# Altium PCB PCB.PcbDoc
Units mil, origin at the board's own origin, x right, y up, seen from the top; angles counter-clockwise.
Board outline 2000 x 2375 mil, 2 copper layers (Top Layer, Bottom Layer); 116 components, 71 nets, 524 pads, 4 vias.
Unrouted connection lines stored in the file: 213.
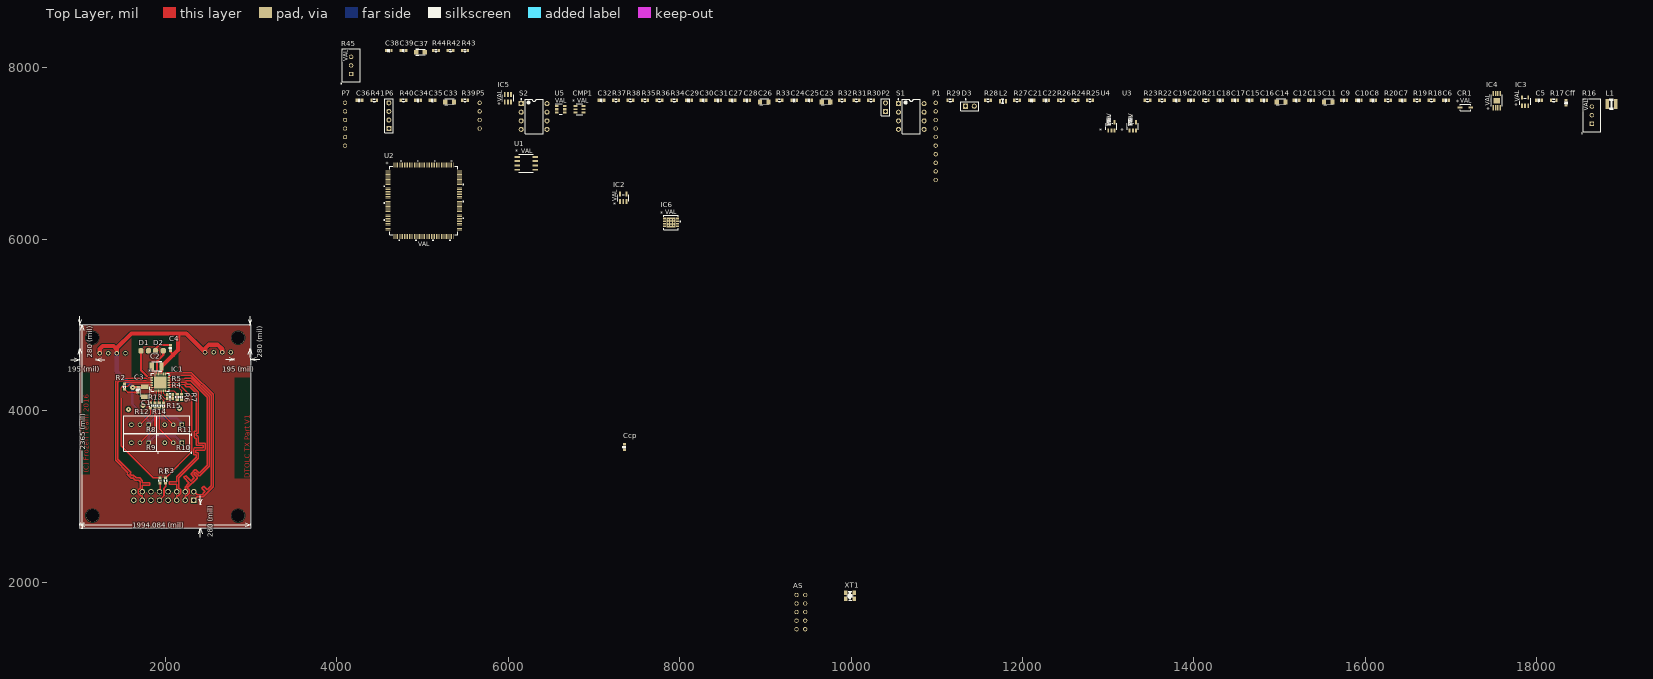
[diagram p0: Top Layer view]
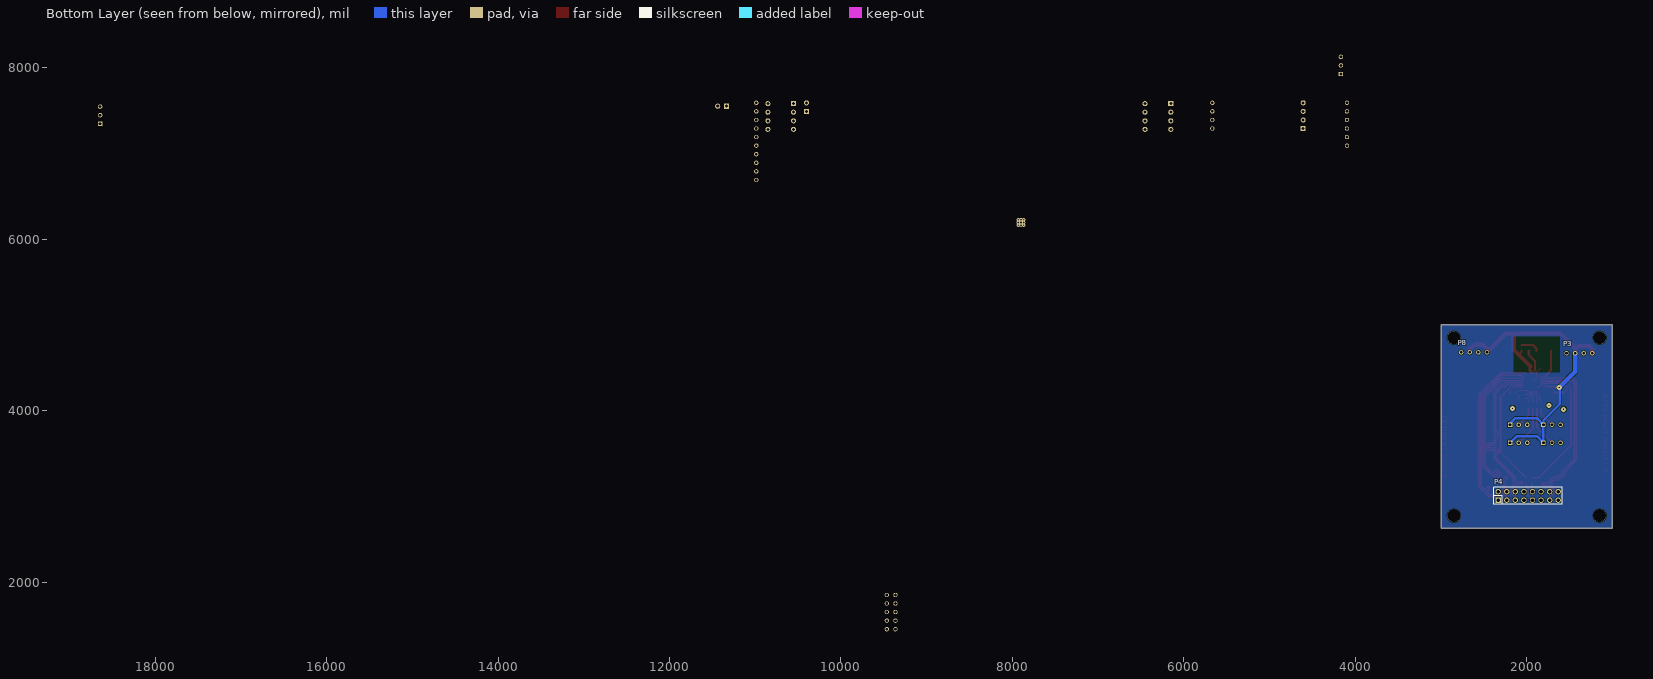
[diagram p1: Bottom Layer view, seen from below]

## Layer stack, top to bottom
Top Solder: solder mask 0.4, Solder Resist, Dk 3.5
Top Layer: signal copper 1.4
Dielectric 1: dielectric 12.6, FR-4, Dk 4.8
Bottom Layer: signal copper 1.4
Bottom Solder: solder mask 0.4, Solder Resist, Dk 3.5

## Board outline
1000,5000 3000,5000 3000,2625 1000,2625

## Design rules (kind name [scope] priority, off if disabled: settings)
Clearance [All] p1: gap=7
DiffPairsRouting DiffPair_DIFF100DiffPairsRouting [InDifferentialPair ('DIFF100')] p1: maxlimit=12 minlimit=10 mostfreqgap=10 toplayer_minwidth=10 toplayer_maxwidth=35 toplayer_prefwidth=31 bottomlayer_minwidth=10 bottomlayer_maxwidth=35 bottomlayer_prefwidth=31 maxuncoupledlength=500
DiffPairsRouting [All] p2: maxlimit=10 minlimit=10 mostfreqgap=10 toplayer_minwidth=15 toplayer_maxwidth=15 toplayer_prefwidth=15 bottomlayer_minwidth=15 bottomlayer_maxwidth=15 bottomlayer_prefwidth=15 maxuncoupledlength=500
MatchedLengths [InNetClass('DIFF100')] p1: tolerance=10 checknetsindiffpair=FALSE checkdiffpairvsdiffpair=TRUE checkxsignals=TRUE checkothers=TRUE
MatchedLengths DiffPair_DIFF100MatchedLengths [InDifferentialPair ('TX_EN2')] p2: tolerance=10 checknetsindiffpair=FALSE checkdiffpairvsdiffpair=TRUE checkxsignals=TRUE checkothers=TRUE
PlaneClearance [All] p1: clearance=25
PolygonConnect [All] p1: connectstyle=Relief reliefconductorwidth=10 reliefentries=4 polygonreliefangle="90 Angle" airgapwidth=10
RoomDefinition TransmitterV1 [InComponentClass('TransmitterV1')] p1: confinementstyle=ConfineIn formatcopy=TRUE lockcomponents=FALSE outline 1000,2625 3000,2625 3000,5000 1000,5000
RoomDefinition PhotodiodeReceiverV1 [InComponentClass('PhotodiodeReceiverV1')] p2: confinementstyle=ConfineIn formatcopy=TRUE lockcomponents=FALSE outline 4037.6,5636 18957.6,5636 18957.6,8331 4037.6,8331
RoomDefinition PowerSupply [InComponentClass('PowerSupply')] p3: confinementstyle=ConfineIn formatcopy=TRUE lockcomponents=FALSE outline 7045,2645 14165,2645 14165,3755 7045,3755
RoomDefinition Main [InComponentClass('Main')] p4: confinementstyle=ConfineIn formatcopy=TRUE lockcomponents=FALSE outline 7045,1060 20945,1060 20945,3175 7045,3175
RoutingVias [All] p1: holewidth=28 width=50 viastyle="Through Hole" minholewidth=28 minwidth=50 maxholewidth=28 maxwidth=50
SolderMaskExpansion [All] p1: expansion=4
Width [All] p1: maxlimit=150 minlimit=8 preferedwidth=10 minimp=50.000000 maximp=50.000000 favimp=50.000000
28 further rules are at their usual default settings.

## Classes and differential pairs
component class Main: AS IC2 U1 U2 XT1
component class PhotodiodeReceiverV1: C5 C6 C7 C8 C9 C10 C11 C12 C13 C14 C15 C16 C17 C18 C19 C20 C21 C22 C23 C24 C25 C26 C27 C28 C29 C30 C31 C32 C33 C34 C35 C36 Cff CMP1 CR1 D3 IC3 IC4 IC5 L1 L2 P1 P2 P5 P6 P7 R16 R17 R18 R19 R20 R21 R22 R23 R24 R25 R26 R27 R28 R29 R30 R31 R32 R33 R34 R35 R36 R37 R38 R39 R40 R41 S1 S2 U3 U4 U5
component class PowerSupply: C37 C38 C39 Ccp IC6 R42 R43 R44 R45
component class TransmitterV1: C1 C2 C3 C4 D1 D2 IC1 P3 P4 P8 R1 R2 R3 R4 R5 R6 R7 R8 R9 R10 R11 R12 R13 R14 R15
net class DIFF100: TX_EN2_N TX_EN2_P TX_EN3_N TX_EN3_P TX_EN4_N TX_EN4_P TX_OSC_EN_N TX_OSC_EN_P
differential pair class DIFF100: TX_EN2 TX_EN3 TX_EN4 TX_OSC_EN
differential pair TX_EN4: +TX_EN4_P -TX_EN4_N
differential pair TX_EN2: +TX_EN2_P -TX_EN2_N
differential pair TX_EN3: +TX_EN3_P -TX_EN3_N
differential pair TX_OSC_EN: +TX_OSC_EN_P -TX_OSC_EN_N

## Components (designator, comment, footprint, x,y, rotation, side; value= is the part's Value field where it differs from the comment)
AS "HDR2x5_2.54" HDR2X5_2.54_180 9365,1850 r0 top
C1 "Cap_Tan_1210" CAP_TAN_B1210 1761,4220 r270 top
C2 "Cap_Tan_1210" CAP_TAN_B1210 1900,4515 r180 top
C3 "Cap_0603" CAP_0603 1680,4243 r90 top
C4 "Cap_0603" CAP_0603 2060,4730 r270 top
C5 "Cap_0603" CAP_0603 18027.6,7621 r0 top
C6 "Cap_0603" CAP_0603 16942.6,7621 r0 top
C7 "Cap_0603" CAP_0603 16432.6,7621 r0 top
C8 "Cap_0603" CAP_0603 16092.6,7621 r0 top
C9 "Cap_0603" CAP_0603 15752.6,7621 r0 top
C10 "Cap_0603" CAP_0603 15922.6,7621 r0 top
C11 "Cap_Tan_1206" CAP_TAN_A1206 15567.6,7601 r0 top
C12 "Cap_0603" CAP_0603 15197.6,7621 r0 top
C13 "Cap_0603" CAP_0603 15367.6,7621 r0 top
C14 "Cap_Tan_1206" CAP_TAN_A1206 15017.6,7601 r0 top
C15 "Cap_0603" CAP_0603 14647.6,7621 r0 top
C16 "Cap_0603" CAP_0603 14817.6,7621 r0 top
C17 "Cap_0603" CAP_0603 14477.6,7621 r0 top
C18 "Cap_0603" CAP_0603 14307.6,7621 r0 top
C19 "Cap_0603" CAP_0603 13797.6,7621 r0 top
C20 "Cap_0603" CAP_0603 13967.6,7621 r0 top
C21 "Cap_0603" CAP_0603 12107.6,7621 r0 top
C22 "Cap_0603" CAP_0603 12277.6,7621 r0 top
C23 "Cap_Tan_1206" CAP_TAN_A1206 9707.6,7601 r0 top
C24 "Cap_0603" CAP_0603 9337.6,7621 r0 top
C25 "Cap_0603" CAP_0603 9507.6,7621 r0 top
C26 "Cap_Tan_1206" CAP_TAN_A1206 8987.6,7601 r0 top
C27 "Cap_0603" CAP_0603 8617.6,7621 r0 top
C28 "Cap_0603" CAP_0603 8787.6,7621 r0 top
C29 "Cap_0603" CAP_0603 8107.6,7621 r0 top
C30 "Cap_0603" CAP_0603 8277.6,7621 r0 top
C31 "Cap_0603" CAP_0603 8447.6,7621 r0 top
C32 "Cap_0603" CAP_0603 7087.6,7621 r0 top
C33 "Cap_Tan_1206" CAP_TAN_A1206 5317.6,7601 r0 top
C34 "Cap_0603" CAP_0603 4947.6,7621 r0 top
C35 "Cap_0603" CAP_0603 5117.6,7621 r0 top
C36 "Cap_0603" CAP_0603 4267.6,7621 r0 top
C37 "Cap_Tan_1206" CAP_TAN_A1206 4977.6,8181 r0 top
C38 "Cap_0603" CAP_0603 4607.6,8201 r0 top
C39 "Cap_0603" CAP_0603 4777.6,8201 r0 top
Ccp "Cap_0603" CAP_0603 7355,3575 r90 top
Cff "Cap_0603" CAP_0603 18342.6,7591 r90 top
CMP1 "LMH7220MKNOPB" MK06A 6832.6,7516 r0 top
CR1 "MBR0530PBF" DIODE_SOD123 17167.6,7536 r0 top
D1 "Laser Diode" LaserDiode 1716,4698 r0 top
D2 "Laser Diode" LaserDiode 1976,4698 r180 top
D3 "BXT65" PIN2 11337.6,7551 r0 top
IC1 "LMH6525SPNOPB" SPA28A 1941,4330 r0 top
IC2 "TPS76912DBVR" DBV5 7342.6,6481 r90 top
IC3 "LM27313XMFXNOPB" MF05A 17862.6,7606 r90 top
IC4 "TPS7A4901DGNT" DGN8_1P89X1P57 17532.6,7616 r90 top
IC5 "DAC7571IDBVT" DBV6 5997.6,7646 r90 top
IC6 "LP38798SD-ADJNOP" DNT12 7900,6195 r0 top
L1 "Ind_CD32" IND_CD32 18872.6,7576 r0 top
L2 "Ind_0805" IND_0805 11772.6,7611 r0 top
P1 "HDR1x10_2.54" HDR1X10_2.54_180 10987.6,7591 r0 top
P2 "Header 2" HDR1X2 10402.6,7491 r90 top
P3 "HDR1x4_2.54" HDR1x4_2.54_180 1235,4670 r270 bottom
P4 "WE-2.54 mm Pin Header" 61301621121 1983,3005 r180 bottom
P5 "HDR1x4_2.54" HDR1x4_2.54_180 5667.6,7591 r0 top
P6 "Header 4" HDR1X4 4607.6,7291 r90 top
P7 "HDR1x6_2.54" HDR1X6_2.54_180 4097.6,7591 r0 top
P8 "HDR1x4_2.54" HDR1x4_2.54_180 2465,4680 r270 bottom
R1 "Res_0603" RES_0603 1940,3185 r90 top
R2 "Res_0603" RES_0603 1525,4283 r90 top
R3 "Res_0603" RES_0603 2005,3185 r270 top
R4 "Res_0603" RES_0603 2055,4140 r180 top
R5 "Res_0603" RES_0603 2055,4185 r180 top
R6 "Res_0603" RES_0603 2140,4161 r90 top
R7 "Res_0603" RES_0603 2190,4161 r90 top
R8 "3296W-1-512LF" POT_3296W 1606,3840 r180 top
R9 "3296W-1-512LF" POT_3296W 1606,3630 r180 top
R10 "3296W-1-512LF" POT_3296W 1995,3630 r180 top
R11 "3296W-1-512LF" POT_3296W 1995,3840 r180 top
R12 "Res_0603" RES_0603 1830,4058 r90 top
R13 "Res_0603" RES_0603 1880,4058 r90 top
R14 "Res_0603" RES_0603 1930,4058 r90 top
R15 "Res_0603" RES_0603 1980,4058 r90 top
R16 "3296W-1-134LF" POT_3296W 18647.6,7546 r90 top
R17 "Res_0603" RES_0603 18197.6,7621 r0 top
R18 "Res_0603" RES_0603 16772.6,7621 r0 top
R19 "Res_0603" RES_0603 16602.6,7621 r0 top
R20 "Res_0603" RES_0603 16262.6,7621 r0 top
R21 "Res_0603" RES_0603 14137.6,7621 r0 top
R22 "Res_0603" RES_0603 13627.6,7621 r0 top
R23 "Res_0603" RES_0603 13457.6,7621 r0 top
R24 "Res_0603" RES_0603 12617.6,7621 r0 top
R25 "Res_0603" RES_0603 12787.6,7621 r0 top
R26 "Res_0603" RES_0603 12447.6,7621 r0 top
R27 "Res_0603" RES_0603 11937.6,7621 r0 top
R28 "Res_0603" RES_0603 11597.6,7621 r0 top
R29 "Res_0603" RES_0603 11157.6,7621 r0 top
R30 "Res_0603" RES_0603 10232.6,7621 r0 top
R31 "Res_0603" RES_0603 10062.6,7621 r0 top
R32 "Res_0603" RES_0603 9892.6,7621 r0 top
R33 "Res_0603" RES_0603 9167.6,7621 r0 top
R34 "Res_0603" RES_0603 7937.6,7621 r0 top
R35 "Res_0603" RES_0603 7597.6,7621 r0 top
R36 "Res_0603" RES_0603 7767.6,7621 r0 top
R37 "Res_0603" RES_0603 7257.6,7621 r0 top
R38 "Res_0603" RES_0603 7427.6,7621 r0 top
R39 "Res_0603" RES_0603 5497.6,7621 r0 top
R40 "Res_0603" RES_0603 4777.6,7621 r0 top
R41 "Res_0603" RES_0603 4437.6,7621 r0 top
R42 "Res_0603" RES_0603 5327.6,8201 r0 top
R43 "Res_0603" RES_0603 5497.6,8201 r0 top
R44 "Res_0603" RES_0603 5157.6,8201 r0 top
R45 "3296W-1-502LF" POT_3296W 4172.6,8126 r90 top
S1 "SW-DIP4" DIP-8 10702.6,7431 r0 top
S2 "SW-DIP4" DIP-8 6302.6,7431 r0 top
U1 "EPCS4SI8N" 8-SOIC 6210,6885 r0 top
U2 "EP2C5T144C8N" 144-TQFP 5015,6450 r0 top
U3 "LMH6629MFENOPB" MF05A 13287.6,7316 r90 top
U4 "LMH6629MFENOPB" MF05A 13037.6,7316 r90 top
U5 "OPA625IDBVR" DBV0006A_N 6612.6,7516 r0 top
XT1 "XTAL_3225_4P" XT_3225_4 9990,1840 r0 top

## Footprints (in the part's own frame and the unit in brackets; to place one, negate y for a bottom-side part, rotate by r counter-clockwise, add the part's x,y. Pads: shape width x height; smd on the part's side, far side on the other; paste and mask are expansions set on the pad)
8-SOIC [mil]
  rect 63x22 smd: 1(-104.5,75) 2(-104.5,25) 3(-104.5,-25) 4(-104.5,-75) 5(104.5,-75) 6(104.5,-25) 7(104.5,25) 8(104.5,75)
  silkscreen extent -84,-103 84,103
144-TQFP [mil]
  rect 58x11 smd: 1(-418,344.49) 2(-418,324.8) 3(-418,305.12) 4(-418,285.43) 5(-418,265.75) 6(-418,246.06) 7(-418,226.38) 8(-418,206.69) 9(-418,187.01) 10(-418,167.32) 11(-418,147.64) 12(-418,127.95) 13(-418,108.27) 14(-418,88.58) 15(-418,68.9) 16(-418,49.21) 17(-418,29.53) 18(-418,9.84) 19(-418,-9.84) 20(-418,-29.53) 21(-418,-49.21) 22(-418,-68.9) 23(-418,-88.58) 24(-418,-108.27) 25(-418,-127.95) 26(-418,-147.64) 27(-418,-167.32) 28(-418,-187.01) 29(-418,-206.69) 30(-418,-226.38) 31(-418,-246.06) 32(-418,-265.75) 33(-418,-285.43) 34(-418,-305.12) 35(-418,-324.8) 36(-418,-344.49) 73(418,-344.49) 74(418,-324.8) 75(418,-305.12) 76(418,-285.43) 77(418,-265.75) 78(418,-246.06) 79(418,-226.38) 80(418,-206.69) 81(418,-187.01) 82(418,-167.32) 83(418,-147.64) 84(418,-127.95) 85(418,-108.27) 86(418,-88.58) 87(418,-68.9) 88(418,-49.21) 89(418,-29.53) 90(418,-9.84) 91(418,9.84) 92(418,29.53) 93(418,49.21) 94(418,68.9) 95(418,88.58) 96(418,108.27) 97(418,127.95) 98(418,147.64) 99(418,167.32) 100(418,187.01) 101(418,206.69) 102(418,226.38) 103(418,246.06) 104(418,265.75) 105(418,285.43) 106(418,305.12) 107(418,324.8) 108(418,344.49)
  rect 11x58 smd: 37(-344.49,-418) 38(-324.8,-418) 39(-305.12,-418) 40(-285.43,-418) 41(-265.75,-418) 42(-246.06,-418) 43(-226.38,-418) 44(-206.69,-418) 45(-187.01,-418) 46(-167.32,-418) 47(-147.64,-418) 48(-127.95,-418) 49(-108.27,-418) 50(-88.58,-418) 51(-68.9,-418) 52(-49.21,-418) 53(-29.53,-418) 54(-9.84,-418) 55(9.84,-418) 56(29.53,-418) 57(49.21,-418) 58(68.9,-418) 59(88.58,-418) 60(108.27,-418) 61(127.95,-418) 62(147.64,-418) 63(167.32,-418) 64(187.01,-418) 65(206.69,-418) 66(226.38,-418) 67(246.06,-418) 68(265.75,-418) 69(285.43,-418) 70(305.12,-418) 71(324.8,-418) 72(344.49,-418) 109(344.49,418) 110(324.8,418) 111(305.12,418) 112(285.43,418) 113(265.75,418) 114(246.06,418) 115(226.38,418) 116(206.69,418) 117(187.01,418) 118(167.32,418) 119(147.64,418) 120(127.95,418) 121(108.27,418) 122(88.58,418) 123(68.9,418) 124(49.21,418) 125(29.53,418) 126(9.84,418) 127(-9.84,418) 128(-29.53,418) 129(-49.21,418) 130(-68.9,418) 131(-88.58,418) 132(-108.27,418) 133(-127.95,418) 134(-147.64,418) 135(-167.32,418) 136(-187.01,418) 137(-206.69,418) 138(-226.38,418) 139(-246.06,418) 140(-265.75,418) 141(-285.43,418) 142(-305.12,418) 143(-324.8,418) 144(-344.49,418)
  silkscreen extent -467,-467 467,467
61301621121 [mm] "16 pins, dual pin, straight, gold plating"
  rect 1.6x1.6 hole 1.1: 1(-8.89,-1.27)
  round 1.6 hole 1.1: 2(-6.35,-1.27) 3(-3.81,-1.27) 4(-1.27,-1.27) 5(1.27,-1.27) 6(3.81,-1.27) 7(6.35,-1.27) 8(8.89,-1.27) 9(8.89,1.27) 10(6.35,1.27) 11(3.81,1.27) 12(1.27,1.27) 13(-1.27,1.27) 14(-3.81,1.27) 15(-6.35,1.27) 16(-8.89,1.27)
  silkscreen extent -10.16,-2.54 10.16,2.54, body extent -10.16,-2.54 10.16,2.54, height 8.55
CAP_0603 [mil]
  rect 28x36 smd: 1(-32,0) 2(32,0)
  silkscreen extent -10,-16 10,16, body extent -31,-16 32,16, height 36
CAP_TAN_A1206 [mil]
  rect 50x54 smd: 1(-50,0) 2(50,0)
  silkscreen extent -55,-39 55,39, body extent -63,-31 63,32, height 71
CAP_TAN_B1210 [mil]
  rect 50x92 smd: 1(-57,0) 2(57,0)
  silkscreen extent -60,-60 60,60, body extent -69,-55 69,55, height 83
DBV5 [mil]
  rect 58x22 smd: 1(-44,37.4) 2(-44,0) 3(-44,-37.4) 4(44,-37.4) 5(44,37.4)
  silkscreen extent -40,-65 40,65
DBV6 [mil]
  rect 58x22 smd: 1(-44,37.4) 2(-44,0) 3(-44,-37.4) 4(44,-37.4) 5(44,0) 6(44,37.4)
  silkscreen extent -40,-65 40,65
DBV0006A_N [mm]
  rect 1.1x0.65 smd paste+0 mask+0.051: 1(-1.2,0.95) 2(-1.2,0) 3(-1.2,-0.95) 4(1.2,-0.95) 5(1.2,0) 6(1.2,0.95)
  silkscreen extent -1.68,-1.55 0.5,1.55, body extent -1.42,-1.46 1.42,1.46, height 1.09
DGN8_1P89X1P57 [mil]
  rect 62x17 smd: 1(-82.5,38.39) 2(-82.5,12.8) 3(-82.5,-12.8) 4(-82.5,-38.39) 5(82.5,-38.39) 6(82.5,-12.8) 7(82.5,12.8) 8(82.5,38.39)
  rect 61.81x74.41 smd paste-36.7: EPAD(0,0)
  silkscreen extent -66,-66 66,66
DIODE_SOD123 [mil]
  rect 53x28 smd: 1(-63.5,0) 2(63.5,0)
  silkscreen extent -61,-38 61,38
DIP-8 [mm] "DIP; 8 Leads; Row Spacing 7.62 mm; Pitch 2.54 mm"
  rect 1.5x1.5 hole 0.9: 1(-3.81,3.81)
  round 1.5 hole 0.9: 2(-3.81,1.27) 3(-3.81,-1.27) 4(-3.81,-3.81) 5(3.81,-3.81) 6(3.81,-1.27) 7(3.81,1.27) 8(3.81,3.81)
  silkscreen extent -3.93,-5.15 2.65,5.23, body extent -3.6,-5.15 3.6,5.15, height 5.08
DNT12 [mil]
  rect 31.68x11.81 smd: 1(-76.87,49.21) 2(-76.87,29.53) 3(-76.87,9.84) 4(-76.87,-9.84) 5(-76.87,-29.53) 6(-76.87,-49.21) 7(76.87,-49.21) 8(76.87,-29.53) 9(76.87,-9.84) 10(76.87,9.84) 11(76.87,29.53) 12(76.87,49.21)
  rect 102.36x118.11 smd paste-58.56 mask-58.5: 13(0,0)
  round 40 / inner round 60 / far side round 40 hole 20: V(-31,-31) V(-31,0) V(-31,31) V(0,-31) V(0,0) V(0,31) V(31,-31) V(31,0) V(31,31)
  silkscreen extent -86,-84 113,84
HDR1X2 [mm] "Connector; Header; 2 Position"
  rect 1.5x1.5 hole 0.9: 1(0,0)
  round 1.5 hole 0.9: 2(2.54,0)
  silkscreen extent -1.27,-1.27 3.81,1.27
HDR1X4 [mm] "Connector; Header; 4 Position"
  rect 1.5x1.5 hole 0.9: 1(0,0)
  round 1.5 hole 0.9: 2(2.54,0) 3(5.08,0) 4(7.62,0)
  silkscreen extent -1.27,-1.27 8.89,1.27
HDR1x4_2.54_180 [mil]
  round 50 hole 32: 1(0,0) 2(0,-100) 3(0,-200) 4(0,-300)
  body extent -49,-350 49,50, height 323
HDR1X6_2.54_180 [mil]
  round 50 hole 32: 1(0,0) 2(0,-100) 3(0,-200) 4(0,-300) 5(0,-400) 6(0,-500)
  body extent -49,-550 49,50, height 323
HDR1X10_2.54_180 [mil]
  round 50 hole 32: 1(0,0) 2(0,-100) 3(0,-200) 4(0,-300) 5(0,-400) 6(0,-500) 7(0,-600) 8(0,-700) 9(0,-800) 10(0,-900)
  body extent -49,-950 49,50, height 323
HDR2X5_2.54_180 [mil]
  round 50 hole 32: 1(0,0) 2(100,0) 3(0,-100) 4(100,-100) 5(0,-200) 6(100,-200) 7(0,-300) 8(100,-300) 9(0,-400) 10(100,-400)
IND_0805 [mil]
  rect 26x52 smd: 1(-36,0) 2(36,0)
  silkscreen extent -12,-24 12,24, body extent -39,-24 39,24, height 41
IND_CD32 [mil]
  rect 40x120 smd: 1(-50,0) 2(50,0)
  silkscreen extent -20,-60 20,60, body extent -68,-59 68,59, height 83
LaserDiode [mil]
  rrect50% 60x60 smd: A(0,0) K(90,0)
MF05A [mil]
  rect 50x22 smd: 1(-48,37.5) 2(-48,0) 3(-48,-37.5) 4(48,-37.5) 5(48,37.5)
  silkscreen extent -38,-64 38,64
MK06A [mil]
  rect 48x21 smd: 1(-46,37.4) 2(-46,0) 3(-46,-37.4) 4(46,-37.4) 5(46,0) 6(46,37.4)
  silkscreen extent -40,-66 40,66
PIN2 [mm] "Photosensitive Diode; 2 Leads"
  rect 1.5x1.5 hole 0.9: 1(0,0)
  round 1.5 hole 0.9: 2(2.54,0)
  silkscreen extent -1.4,-1.4 3.94,2.17
POT_3296W [mil]
  round 52 / inner round 60 / far side round 52 hole 32: 1(1,5) 2(-99,5)
  rect 52x52 / inner round 60 / far side rect 52x52 hole 32: 3(-199,5)
  silkscreen extent -315,-100 93,125, body extent -286,-92 89,103, height 455
RES_0603 [mil]
  rect 28x36 smd: 1(-32,0) 2(32,0)
  silkscreen extent -10,-16 10,16, body extent -31,-16 32,16, height 20
SPA28A [mil]
  rect 30x12 smd: 1(-97.5,59.06) 2(-97.5,39.37) 3(-97.5,19.69) 4(-97.5,0) 5(-97.5,-19.69) 6(-97.5,-39.37) 7(-97.5,-59.06) 15(97.5,-59.06) 16(97.5,-39.37) 17(97.5,-19.69) 18(97.5,0) 19(97.5,19.69) 20(97.5,39.37) 21(97.5,59.06)
  rect 12x30 smd: 8(-59.06,-97.5) 9(-39.37,-97.5) 10(-19.68,-97.5) 11(0,-97.5) 12(19.68,-97.5) 13(39.37,-97.5) 14(59.06,-97.5) 22(59.06,97.5) 23(39.37,97.5) 24(19.68,97.5) 25(0,97.5) 26(-19.68,97.5) 27(-39.37,97.5) 28(-59.06,97.5)
  rect 141.73x141.73 smd paste-70.37: 29(0,0)
  silkscreen extent -106,-106 106,106, body extent -102,-102 103,103, height 20
XT_3225_4 [mil]
  rect 40x48 smd: 1(-50,-35) 2(50,-35) 3(50,35) 4(-50,35)
  silkscreen extent -38,-54 38,54, body extent -63,-49 63,49, height 41

## Part data
AS P1 P5: "Header"
C1 C2 C3 C4 C5 C6 C7 C8 C9 C10 C11 C12 C13 C14 C15 C16 C17 C18 C19 C20 C21 C22 C23 C24 C25 C26 C27 C28 C29 C30 C31 C32 C33 C34 C35 C36 C37 C38 C39 Ccp Cff: "Capacitor"
CMP1 CR1 IC1 IC2 IC3 IC4 IC5 IC6 U2 U3 U4 U5: "Imported"
D3: library part "Photo Sen", "Photosensitive Diode"
L1 L2: "Inductor"
P2: "Header, 2-Pin"
P3 P8: library part HDR1x4_2.54T, "Header"
P4: library part "WE-2.54 mm Pin Header & Jumper 61301621121", "WR-PHD 2.54 mm Dual Pin Header"
P6: "Header, 4-Pin"
P7: library part HDR1x6_2.54T, "Header"
R1 R2 R3 R4 R5 R6 R7 R12 R13 R14 R15 R17 R18 R19 R20 R21 R22 R23 R24 R25 R26 R27 R28 R29 R30 R31 R32 R33 R34 R35 R36 R37 R38 R39 R40 R41 R42 R43 R44: "Resistor"
R8 R9 R10 R11 R16 R45: library part 3296W-1-503LF, "Imported"
S1 S2: "DIP Switch"
U1: library part epcs4si8n, "Imported"
XT1: "Crystal Oscillator"

## Free pads (board coordinates)
  round 150 / inner round 60 / far side round 150 hole 150: 3(1150,2775) 3(1150,4850) 3(2850,2775) 3(2850,4850)

## Via types
v1: diameter 60, hole 15, Top Layer to Bottom Layer, 4 vias

## Nets (pads, with @x,y where several pads share a name; then routed paths per layer and width w, separated by ;. In a path a pad name is that pad's centre, name@x,y a point inside that pad or via, vN(x,y) a via of type N, cw(c..) or ccw(c..) an arc to the next point about the centre after c; other vN are vias at no path point)
+3.3V: C11.1 C12.2 C13.2 C14.1 C15.2 C16.2 C23.1 C24.2 C25.2 C26.1 C27.2 C28.2 C33.1 C34.2 C35.2 C37.1 C38.2 C39.2 CMP1.5 IC6.10 IC6.11 IC6.12 R23.2 R31.1 R35.2 R36.2 S1.1 U1.3 U1.7 U1.8 U3.5 U4.5 U5.6
+3.3V_REF: IC5.3
+5V: C1.1 C2.1 C3.2 C4.2 C7.2 IC1.6 IC1.24 IC1.25 IC1.26 IC3.4 IC3.5 IC6.1 IC6.2 IC6.3 L1.1 P3.1 P3.3 P8.1 P8.3 R8.3 R9.3 R10.3 R11.3 S1.2 | length 4958.4
  Top Layer w10: C1.1 1774.63,4290.63 IC1.6 ; IC1.26 1921.32,4448.31 C2.1@1957,4484 ; IC1.25 1941,4448 1957,4464 C2.1@1957,4484 ; C2.1 C2.1@1957,4484 ; IC1.24 1960.68,4447.69 1971,4458 C2.1@1971,4501
  Top Layer w12: C2.1 C2.1@1971,4501
  Top Layer w20: v1@1627,4275 C3.2 ; C3.2@1680,4277 C1.1
  Top Layer w25: C4.2 2060,4688 2095,4653
  Top Layer w50: P3.1 1235,4720 1270,4755 1395,4755 1435,4715 ; P3.3 1435,4715 ; C2.1 2095,4653 2150,4708 2150,4900 ; P8.3 2665,4715 2610,4770 2510,4770 2465,4725 P8.1 2245,4900 2150,4900 ; 1435,4715 1435,4730 1605,4900 2150,4900
  Bottom Layer w25: v1@1615,4263 1615,4078 1805,3888 R8.3
  Bottom Layer w30: R10.3 2116,3703 1883,3703 R9.3 R8.3 1883,3913 2130,3913 R11.3@2194,3849
  Bottom Layer w50: P3.3 1435,4455 v1(1620,4270)
+20V: C5.2 C8.2 C10.2 CR1.1 IC4.5 IC4.8 R17.1
+DREG: C6.2 Cff.2 IC4.1 R16.3 S1.3
GND: C1.2 C2.2 C3.1 C4.1 C6.1 C7.1 C8.1 C9.1 C10.1 C11.2 C12.1 C13.1 C14.2 C15.1 C16.1 C21.1 C23.2 C24.1 C25.1 C26.2 C27.1 C28.1 C29.2 C30.2 C31.2 C33.2 C34.1 C35.1 C36.2 C37.2 C38.1 C39.1 Ccp.1 CMP1.2 D1.K D2.K IC1.7 IC1.28 IC1.29 IC3.2 IC4.3 IC4.4 IC4.EPAD IC5.2 IC6.6 IC6.7 IC6.13 L2.1 P2.1 P3.2 P3.4 P4.4 P4.6 P4.8 P4.9 P4.11 P4.13 P5.3 P5.4 P6.1 P6.2 P7.2 P7.4 P7.6 P8.2 P8.4 R2.1 R4.1 R5.1 R6.1 R7.1 R8.1 R9.1 R10.1 R11.1 R19.1 R20.2 R26.1 R27.2 R28.2 R41.1 R45.1 U1.4 U2.6 U2.19 U2.33 U2.39 U2.49 U2.56 U2.61 U2.68 U2.78 U2.98 U2.105 U2.111 U2.117 U2.123 U2.128 U2.130 U2.140 U3.2 U4.2 U5.2 U5.5 | length 678.7
  Top Layer w8: IC1.29@1881.94,4389.06 IC1.29
  Top Layer w10: C2.2@1843,4491 1881.94,4452.06 IC1.28 ; IC1.7 IC1.29@1881.94,4270.94
  Top Layer w12: IC1.29@1881.94,4389.06 IC1.28 ; R4.1 R5.1
  Top Layer w20: R2.1 1565,4211 C3.1
  Top Layer w25: D2.K@1890,4702 D2.K 1886,4721 1930,4765 2057,4765 C4.1
  other v1: 1570,4015 2165,4025 1740,4060
MEM_ASDI: U1.5
MEM_CLK: U1.6
MEM_CS_N: U1.1
MEM_DATA: U1.2
NetC5_1: C5.1 IC3.3 R17.2 R19.2
NetC9_2: C9.2 IC4.6
NetC17_1: C17.1 C20.1 R21.1 R24.1 U3.1
NetC17_2: C17.2 C19.2 D3.1 R21.2 R29.1 U3.4
NetC18_1: C18.1 CMP1.1 R22.1 R27.1 R30.2 R32.2 R33.2 U4.1
NetC18_2: C18.2 C22.1 R22.2 R25.1 U4.4
NetC19_1: C19.1 C20.2
NetC21_2: C21.2 R23.1 R26.2 U3.3 U4.3
NetC22_2: C22.2 L2.2 R24.2 R25.2 R28.1
NetC29_1: C29.1 C30.1 C31.1 R30.1 R31.2 R32.1 R33.1 S2.1
NetC32_1: C32.1 CMP1.4 R34.1 R37.2
NetC32_2: C32.2 CMP1.6 R37.1 R40.2
NetC36_1: C36.1 R40.1 R41.2 U5.1 U5.4
NetCcp_2: Ccp.2 IC6.4
NetCff_1: Cff.1 IC4.2 R18.2 R20.1
NetCMP1_3: CMP1.3 R39.2
NetCR1_2: CR1.2 IC3.1 L1.2
NetD1_A: D1.A IC1.1 | length 387.3
  Top Layer w10: 1786,4403 1799.94,4389.06 IC1.1
  Top Layer w25: D1.A 1716,4473 1786,4403
NetD2_A: D2.A IC1.27 | length 301.3
  Top Layer w10: IC1.27 1901.63,4472.37
  Top Layer w25: 1901.63,4472.37 1901.63,4573.63 1976,4648 D2.A
NetD3_2: D3.2 R29.2 S1.5 S1.6 S1.7 S1.8
NetIC1_4: IC1.4 R2.2 | length 326.1
  Top Layer w10: R2.2 1541,4331 1843.5,4331 IC1.4
NetIC1_5: IC1.5 R1.2 | length 1666.6
  Top Layer w10: 1485,4145 1485,4268 1500,4283 1560,4283 1591,4314 1811.97,4314 1815.66,4310.31 IC1.5
  Top Layer w20: 1485,4145 1485,3590 1858,3217 R1.2
NetIC1_8: IC1.8 R12.2 | length 164
  Top Layer w10: R12.2 1830,4108 1850,4128 1850,4165 1881.94,4196.94 IC1.8
NetIC1_9: IC1.9 R13.2 | length 151.5
  Top Layer w10: R13.2 1880,4155 1901.63,4176.63 IC1.9
NetIC1_10: IC1.10 R14.2 | length 133.8
  Top Layer w10: R14.2@1921.32,4098.69 IC1.10
NetIC1_11: IC1.11 R15.2 | length 158.7
  Top Layer w10: IC1.11 1941,4154 1980,4115 R15.2
NetIC1_12: IC1.12 R4.2 | length 134.7
  Top Layer w10: IC1.12 1960.68,4174.31 1995,4140 R4.2
NetIC1_13: IC1.13 R5.2 | length 84.1
  Top Layer w10: IC1.13 1980.37,4195.37 1990.74,4185 R5.2
NetIC1_14: IC1.14 R6.2 | length 156.3
  Top Layer w10: IC1.14 2100.5,4232.5 R6.2
NetIC1_15: IC1.15 R7.2 | length 207.2
  Top Layer w10: IC1.15 2152.06,4270.94 2190,4233 R7.2
NetIC1_16: IC1.16 R3.1 | length 1390.8
  Top Layer w10: IC1.16 2179.37,4290.63 2190,4280
  Top Layer w20: R3.1 2305,3517 2305,4165 2190,4280
NetIC5_1: IC5.1 S2.2
NetIC5_4: IC5.4 P7.5 R36.1
NetIC5_5: IC5.5 P7.3 R35.1
NetIC5_6: IC5.6 P7.1
NetIC6_5: IC6.5 R42.1
NetIC6_8: IC6.8 R43.2 R44.2
NetIC6_9: IC6.9 R43.1
NetP2_2: P2.2 S1.4
NetP5_1: P5.1 R34.2 R38.1
NetP5_2: P5.2 R38.2 R39.1
NetP6_3: P6.3 S2.4
NetP6_4: P6.4 S2.3
NetR8_2: R8.2 R12.1 | length 242.8
  Top Layer w20: R8.2 1830,3960 R12.1
NetR9_2: R9.2 R13.1 | length 473.5
  Top Layer w20: R9.2 1880,3800 R13.1
NetR10_2: R10.2 R14.1 | length 468.9
  Top Layer w20: R14.1 1930,3789 R10.2
NetR11_2: R11.2 R15.1 | length 238.2
  Top Layer w20: R15.1 1980,3949 R11.2
NetR16_1: R16.1 R16.2 R18.1
NetR44_1: R44.1 R45.2 R45.3
NetS2_5: S2.5 S2.6 S2.7 S2.8 U5.3
PS_3.3V_EN: R42.2
TX_EN2_N: IC1.17 P4.14 | length 2028.9
  Top Layer w10: IC1.17 2214.68,4310.31
  Top Layer w15: P4.14 2133,3125 2133,3140 2043.84,3140 2043.84,3170 2133,3170 2133,3200 2133,3225 2133,3228 2360,3455 2360,3484.82 2336.82,3484.82 2329.5,3492.14 2329.5,3557.5 2336.82,3564.82 2443,3564.82 2443,3594.82 2367.32,3594.82 2360,3602.14 2360,3680 2345.65,3680 2338.33,3687.32 2338.33,3752.68 2345.65,3760 2360,3760 2360,4205 2285,4280 2245,4280 2220,4305
TX_EN2_P: IC1.18 P4.3 | length 2036.2
  Top Layer w10: IC1.18 2230.36,4330
  Top Layer w15: P4.3 2133,3009 2152.05,3009 2179,3035.95 2179,3074.05 2158,3095.05 2158,3217.64 2377.68,3437.32 2385,3444.64 2385,3502.5 2377.68,3509.82 2354.5,3509.82 2354.5,3539.82 2460.68,3539.82 2468,3547.14 2468,3612.5 2460.68,3619.82 2385,3619.82 2385,3697.68 2377.68,3705 2363.33,3705 2363.33,3735 2377.68,3735 2385,3742.32 2385,4215.36 2377.68,4222.68 2302.68,4297.68 2295.36,4305 2255.36,4305 2230.36,4330
TX_EN3_N: IC1.19 P4.15 | length 2041.2
  Top Layer w10: IC1.19 2241.15,4349.69
  Top Layer w15: P4.15 2233,3108 2270,3145 2280.61,3155.61 2215.91,3220.3 2237.12,3241.52 2301.82,3176.82 2323.03,3198.03 2340.61,3215.61 2300.41,3255.8 2300.41,3266.16 2346.62,3312.37 2356.98,3312.37 2397.18,3272.18 2490,3365 2490,4155 2295,4350 2241.47,4350
TX_EN3_P: IC1.20 P4.2 | length 2039.5
  Top Layer w10: IC1.20 2219.01,4369.37 2224.64,4375
  Top Layer w15: 2224.64,4375 2305.36,4375 2312.68,4367.68 2432.68,4247.68 2507.68,4172.68 2513,4167.36 2513,3352.64 2402.35,3242 2392,3242 2351.8,3282.19 2330.59,3260.98 2370.78,3220.78 2370.78,3210.43 2258,3097.64 2258,3095.05 2279,3074.05 2279,3035.95 2252.05,3009 2233,3009 P4.2
TX_EN4_N: IC1.21 P4.16 | length 2037.7
  Top Layer w15: IC1.21@2038.5,4389.87 2063.63,4415 2300,4415 2535,4180 2535,3185 2535,3167.5 2535,3137.5 2535,3122.5 2531.75,3119.25 2510.53,3098.03 2489.32,3076.82 2448.67,3117.47 2427.46,3096.26 2468.11,3055.61 2457.5,3045 2430,3017.5 2370.5,3017.5 P4.16
TX_EN4_P: IC1.22 P4.1 | length 2038
  Top Layer w15: IC1.22@2000.87,4427.5 2012.5,4427.5 2025,4440 2310.36,4440 2317.68,4432.68 2552.68,4197.68 2560,4190.36 2560,3112.14 2440.36,2992.5 2370.5,2992.5 P4.1
TX_ENABLE: P4.12 R1.1 | length 100.9
  Top Layer w20: P4.12 1940,3062 R1.1
TX_OSC_EN_N: IC1.3 P4.10 | length 2027.9
  Top Layer w10: 1785,4350 IC1.3
  Top Layer w15: P4.10 1733,3060 1733,3070 1733,3100 1733,3130 1821.37,3130 1821.37,3160 1733,3160 1733,3175 1733,3182 1700,3215 1660,3215 1626.41,3248.59 1616.06,3248.59 1607.09,3239.62 1585.88,3260.84 1594.84,3269.8 1594.84,3280.16 1445,3430 1445,4330 1465.5,4350.5 1780,4350.5
TX_OSC_EN_P: IC1.2 P4.7 | length 2039
  Top Layer w10: 1779.5,4375.5 1785.63,4369.37 IC1.2
  Top Layer w15: P4.7 1733,3009 1713.95,3009 1687,3035.95 1687,3074.05 1708,3095.05 1708,3171.64 1689.64,3190 1649.64,3190 1621.23,3218.41 1612.27,3209.45 1601.91,3209.45 1555.7,3255.66 1555.7,3266.01 1564.67,3274.98 1420,3419.64 1420,4340.36 1455.14,4375.5 1779.5,4375.5
TX_SELB: P4.5 R3.2 | length 227.8
  Top Layer w20: P4.5 1984.5,3006.5 1984.5,3095.58 2005,3116.08 R3.2
pads on no net: AS.1 AS.2 AS.3 AS.4 AS.5 AS.6 AS.7 AS.8 AS.9 AS.10 IC1.23 IC2.1 IC2.2 IC2.3 IC2.4 IC2.5 IC4.7 IC6.V P1.1 P1.2 P1.3 P1.4 P1.5 P1.6 P1.7 P1.8 P1.9 P1.10 U2.1 U2.2 U2.3 U2.4 U2.5 U2.7 U2.8 U2.9 U2.10 U2.11 U2.12 U2.13 U2.14 U2.15 U2.16 U2.17 U2.18 U2.20 U2.21 U2.22 U2.23 U2.24 U2.25 U2.26 U2.27 U2.28 U2.29 U2.30 U2.31 U2.32 U2.34 U2.35 U2.36 U2.37 U2.38 U2.40 U2.41 U2.42 U2.43 U2.44 U2.45 U2.46 U2.47 U2.48 U2.50 U2.51 U2.52 U2.53 U2.54 U2.55 U2.57 U2.58 U2.59 U2.60 U2.62 U2.63 U2.64 U2.65 U2.66 U2.67 U2.69 U2.70 U2.71 U2.72 U2.73 U2.74 U2.75 U2.76 U2.77 U2.79 U2.80 U2.81 U2.82 U2.83 U2.84 U2.85 U2.86 U2.87 U2.88 U2.89 U2.90 U2.91 U2.92 U2.93 U2.94 U2.95 U2.96 U2.97 U2.99 U2.100 U2.101 U2.102 U2.103 U2.104 U2.106 U2.107 U2.108 U2.109 U2.110 U2.112 U2.113 U2.114 U2.115 U2.116 U2.118 U2.119 U2.120 U2.121 U2.122 U2.124 U2.125 U2.126 U2.127 U2.129 U2.131 U2.132 U2.133 U2.134 U2.135 U2.136 U2.137 U2.138 U2.139 U2.141 U2.142 U2.143 U2.144 XT1.1 XT1.2 XT1.3 XT1.4

## Polygon pours and split planes (outlines as drawn)
GND on Top Layer "TopGND" (solid, pour order 0): 1806,4398 1846,4398 1876,4398 1881,4398 1881,4488 1881,4583 1945.5,4647.5 1945.5,4738.5 1931,4753 1881,4753 1751,4753 1731,4733 1731,4618 1731,4543 1731,4473 1786,4418
GND on Top Layer "TopGND" (solid, remove dead copper, pour order 2): 1865,4273 1795,4273 1715,4273 1715,4223 1705,4223 1680,4223 1485,4223 1485,3940 1485,3590 1858,3217 2005,3217 2230,3442 2305,3517 2305,3843 2305,4168 2090,4168 1980,4168 1980,4015 1825,4015 1825,4128 1865,4168
GND on Top Layer "TopGND" (solid, pour order 12): 1000,5000 1610,5000 1610,4450 1610,4445 1610,4440 1610,4385 1455,4385 1455,3385 1495,3350 1690,3155 1690,3055 2055,3055 2290,3050 2505,3050 2570,3115 2565,4200 2310,4455 2225,4455 2150,4455 2150,4925 1610,4925 1610,5000 2150,5000 3000,5000 3000,2625 1000,2625
GND on Bottom Layer "BottomGND" (solid, pour order 10): 1000,5000 1615,5000 2150,5000 2150,4860 1615,4860 1615,4725 1615,4450 2150,4450 2150,4725 2150,5000 3000,5000 3000,2625 1000,2625

## Other copper
Top Layer:
  text "(C) Frozen Team 2016" at 1105,3275 h60 r90
  text "DTOLC TX Part V1" at 2985,3210 h60 r90

## Silkscreen, mask and mechanical layers (free items; w line width, h text height)
Top Overlay:
  lines w5: 985,4660 1005,4720 ; 985,5060 1005,5000 ; 995,4720 1015,4720 ; 995,5000 1015,5000 ; 1000.91,2660.99 1000.92,2680.99 ; 1005,4620 1005,4720 ; 1005,5100 1005,5000 ; 1010,2690 1030,2630 ; 1010,4935 1030,4995 ; 1020,2630 1040,2630 ; 1020,4995 1040,4995 ; 1025,4660 1005,4720 ; 1025,5060 1005,5000 ; 1030,3531.59 1030,2630 ; 1030,4093.41 1030,4995 ; 1050,2690 1030,2630 ; 1050,4935 1030,4995 ; 1060.91,2650.96 1000.92,2670.99 ; 1060.93,2690.96 1000.92,2670.99 ; 1607.08,2670.69 1000.92,2670.99 ; 2388.84,2670.3 2995,2670 ; 2705,4600 2805,4600 ; 2745,4580 2805,4600 ; 2745,4620 2805,4600 ; 2805,4590 2805,4610 ; 2934.99,2650.03 2995,2670 ; 2935.01,2690.03 2995,2670 ; 2970,4660 2990,4720 ; 2970,5060 2990,5000 ; 2980,4720 3000,4720 ; 2980,5000 3000,5000 ; 2990,4620 2990,4720 ; 2990,5100 2990,5000 ; 2994.99,2660 2995,2680 ; 3000,4590 3000,4610 ; 3010,4660 2990,4720 ; 3010,5060 2990,5000 ; 3060,4580 3000,4600 ; 3060,4620 3000,4600 ; 3100,4600 3000,4600
  lines w10: 900,4595 1000,4595 ; 940,4575 1000,4595 ; 940,4615 1000,4595 ; 1000,4585 1000,4605 ; 1195,4585 1195,4605 ; 1255,4575 1195,4595 ; 1255,4615 1195,4595 ; 1295,4595 1195,4595 ; 2390,2565 2410,2625 ; 2390,2965 2410,2905 ; 2400,2625 2420,2625 ; 2400,2905 2420,2905 ; 2410,2525 2410,2625 ; 2410,3005 2410,2905 ; 2430,2565 2410,2625 ; 2430,2965 2410,2905
  text "280 (mil)" at 1148.96,4619.08 h60 r90
  text "280 (mil)" at 3133.96,4619.08 h60 r90
  text "195 (mil)" at 2666.57,4456.04 h60
  text "195 (mil)" at 861.57,4451.04 h60
  text "2365 (mil)" at 1065.99,3541.59 h60 r90
  text "1994.084 (mil)" at 1617.06,2634.69 h60 r359.97
  text "280 (mil)" at 2553.96,2524.08 h60 r90

## Text inside footprints (layer, text, board x,y; h text height)
CMP1: Top Overlay "*" at 6747.6,7581 h50; Top Overlay "VAL" at 6807.6,7591 h50; Mechanical 1 "*" at 6747.6,7581 h50
CR1: Top Overlay "VAL" at 17107.6,7591 h50; Top Overlay "*" at 17062.6,7576 h50; Mechanical 13 "*" at 17062.6,7576 h50; Multi-Layer "Copyright (C) 2015 Accelerated Designs. All rights reserved" at 17167.6,7536 h1
IC1: Top Overlay "*" at 1801,4430 h50; Mechanical 1 "*" at 1801,4430 h50
IC2: Top Overlay "VAL" at 7267.6,6441 h50 r90; Top Overlay "*" at 7277.6,6396 h50 r90; Mechanical 13 "*" at 7277.6,6396 h50 r90; Multi-Layer "Copyright (C) 2015 Accelerated Designs. All rights reserved" at 7342.6,6481 h1 r90
IC3: Top Overlay "*" at 17797.6,7551 h50 r90; Top Overlay "VAL" at 17792.6,7606 h50 r90; Mechanical 1 "*" at 17797.6,7551 h50 r90
IC4: Top Overlay "VAL" at 17452.6,7556 h50 r90; Top Overlay "*" at 17467.6,7506 h50 r90; Mechanical 13 "*" at 17467.6,7506 h50 r90; Multi-Layer "Copyright (C) 2015 Accelerated Designs. All rights reserved" at 17532.6,7616 h1 r90
IC5: Top Overlay "VAL" at 5922.6,7606 h50 r90; Top Overlay "*" at 5932.6,7561 h50 r90; Mechanical 13 "*" at 5932.6,7561 h50 r90; Multi-Layer "Copyright (C) 2015 Accelerated Designs. All rights reserved" at 5997.6,7646 h1 r90
IC6: Top Overlay "*" at 7775,6275 h50; Top Overlay "VAL" at 7835,6290 h50; Mechanical 1 "*" at 7775,6275 h50
R16: Top Overlay "VAL" at 18602.6,7496 h50 r90
R45: Top Overlay "VAL" at 4127.6,8076 h50 r90
U1: Top Overlay "VAL" at 6155,7000 h50; Top Overlay "*" at 6080,6995 h50; Mechanical 13 "*" at 6080,6995 h50; Multi-Layer "Copyright (C) 2015 Accelerated Designs. All rights reserved" at 6210,6885 h1
U2: Top Overlay "*" at 4570,6850 h50; Top Overlay "VAL" at 4950,5920 h50; Mechanical 13 "*" at 4570,6850 h50; Multi-Layer "Copyright (C) 2015 Accelerated Designs. All rights reserved" at 5015,6450 h1
U3: Top Overlay "*" at 13199.1,7258 h50 r90; Top Overlay "PN" at 13287.6,7316 h50 r90; Top Overlay "DEV" at 13287.6,7316 h50 r90; Top Overlay "VAL" at 13287.6,7316 h50 r90; Top Overlay "TOL" at 13287.6,7316 h50 r90; Mechanical 1 "*" at 13219.1,7293 h50 r90; Mechanical 1 "RefDes2" at 13287.6,7316 h50 r90
U4: Top Overlay "*" at 12949.1,7258 h50 r90; Top Overlay "PN" at 13037.6,7316 h50 r90; Top Overlay "DEV" at 13037.6,7316 h50 r90; Top Overlay "VAL" at 13037.6,7316 h50 r90; Top Overlay "TOL" at 13037.6,7316 h50 r90; Mechanical 1 "*" at 12969.1,7293 h50 r90; Mechanical 1 "RefDes2" at 13037.6,7316 h50 r90
U5: Top Overlay "VAL" at 6547.6,7591 h50